# Altium PCB 5Vto12V_Boost_Converter(Motors).PcbDoc
Units mil, origin at the board's own origin, x right, y up, seen from the top; angles counter-clockwise.
Board outline 6000 x 2100 mil, 2 copper layers (Top Layer, Bottom Layer); 18 components, 13 nets, 46 pads, 8 vias.
Unrouted connection lines stored in the file: 7.
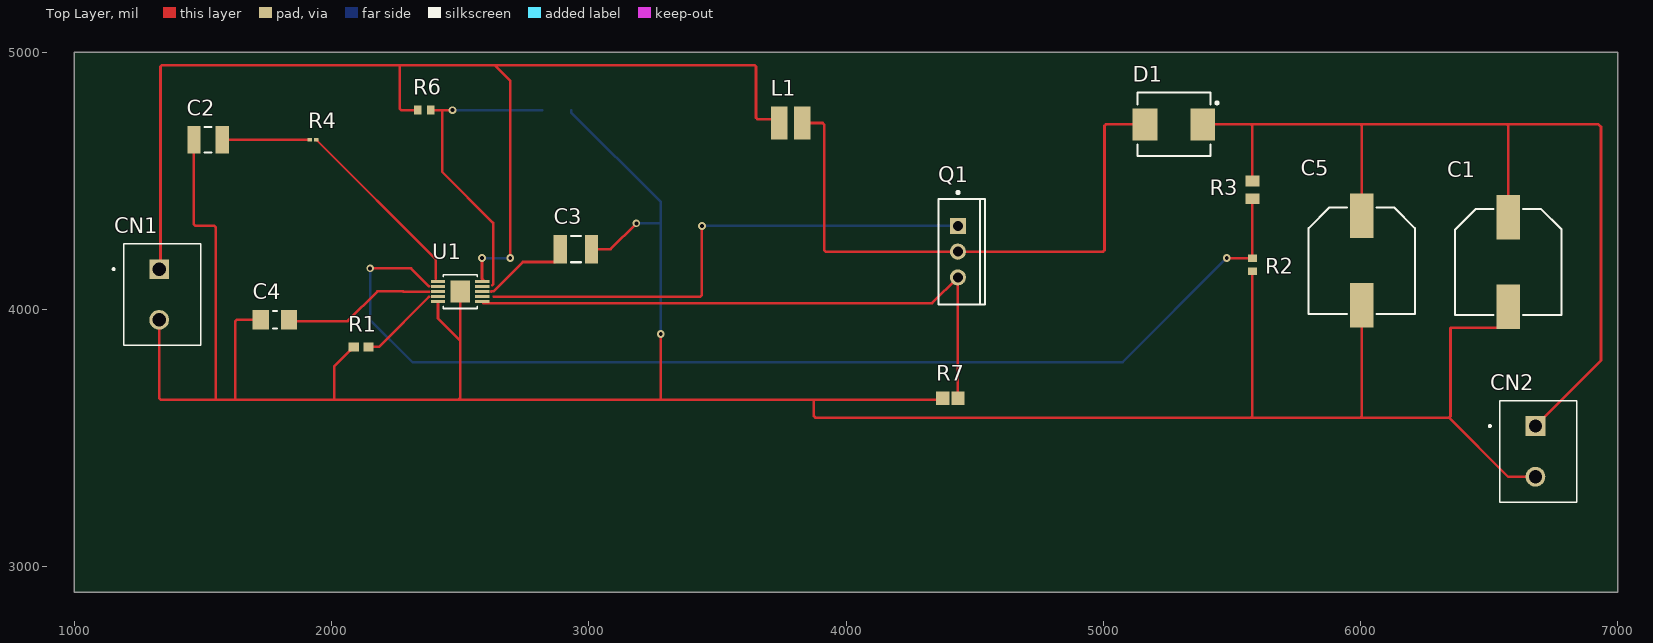
[diagram p0: Top Layer view]
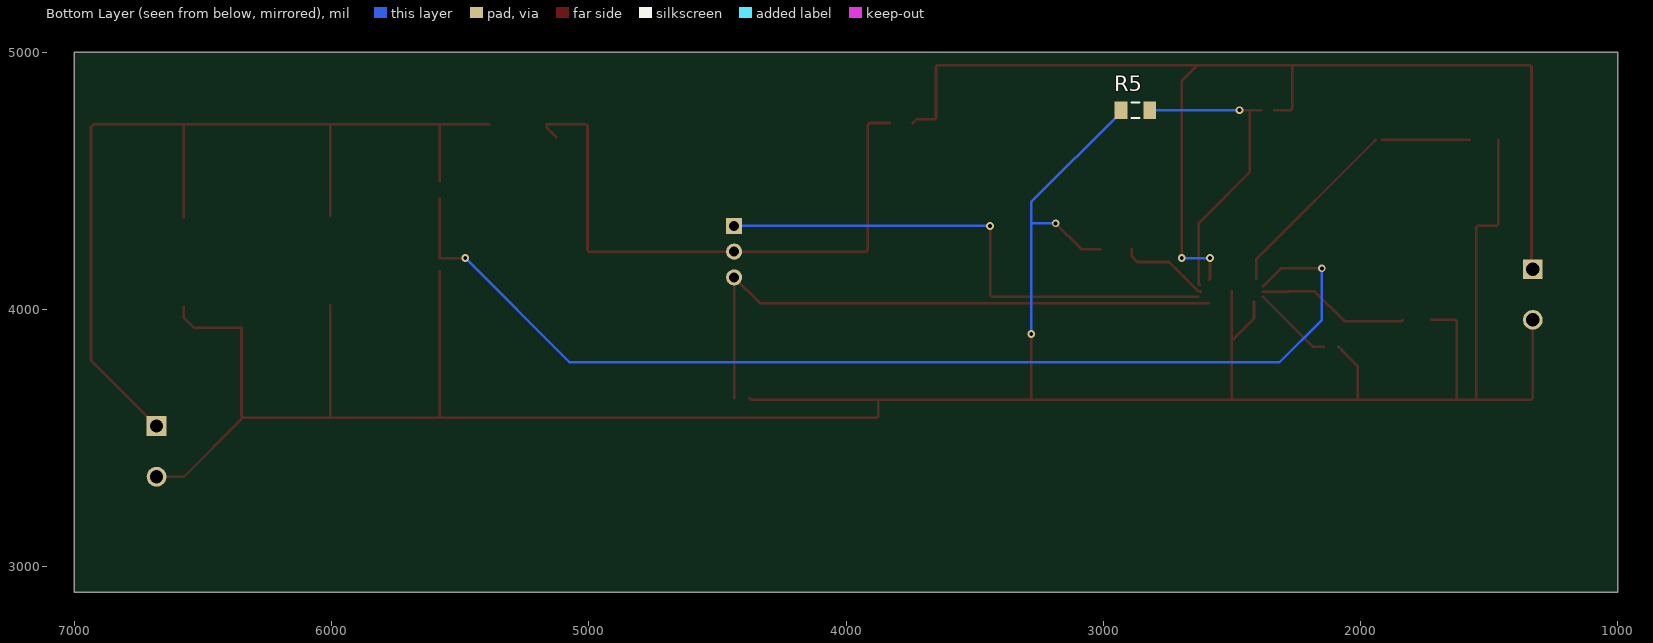
[diagram p1: Bottom Layer view, seen from below]

## Layer stack, top to bottom
Top Solder: solder mask 0.4, Solder Resist, Dk 3.5
Top Layer: signal copper 1.4
Dielectric 1: dielectric 12.6, FR-4, Dk 4.8
Bottom Layer: signal copper 1.4
Bottom Solder: solder mask 0.4, Solder Resist, Dk 3.5

## Board outline
1000,2900 7000,2900 7000,5000 1000,5000

## Design rules (kind name [scope] priority, off if disabled: settings)
Clearance [All] p1: gap=10 ignorepadtopadclearanceinfootprint=FALSE except(0: Arc-Hole Track-Hole SMDPad-Hole THPad-Hole Via-Hole Fill-Hole Poly-Hole Region-Hole Text-Hole)
PolygonConnect [All] p1: connectstyle=Relief reliefconductorwidth=10 reliefentries=4 polygonreliefangle="90 Angle" airgapwidth=10
RoutingVias [All] p1: holewidth=28 width=50 viastyle="Through Hole" minholewidth=28 minwidth=50 maxholewidth=28 maxwidth=50
SolderMaskExpansion [All] p1: expansion=4 istentingtop=FALSE
Width [All] p1: maxlimit=10 minlimit=10 preferedwidth=10
30 further rules are at their usual default settings.

## Components (designator, comment, footprint, x,y, rotation, side; value= is the part's Value field where it differs from the comment)
C1 "C6.8u" C6.8u 6575,4185 r270 top
C2 "C6800p" C6800p 1520,4660 r180 top
C3 "C4.7u" C4.7u 2950,4235 r0 top
C4 "C0.01u" C0.01u 1780,3960 r180 top
C5 "C6.8u" C6.8u 6005,4190 r270 top
CN1 "TB002-500-02BE" TB002-500-02BE 2975,4271.85 r270 top
CN2 "TB002-500-02BE" TB002-500-02BE 8325,3661.85 r270 top
D1 "MBRS340" MBRS340 5275,4720 r0 top
L1 "SRN3030HA-4R7Y(Inductor-1)" SRN3030HA-4R7Y(Inductor-1) 3784.68,4725 r0 top
Q1 "IPP126N10N3" IPP126N10N3 790,-14505 r0 top
R1 "R24.3k" R24.3k 2115,3855 r180 top
R2 "R11k" R11k 4850,54298.41 r270 top
R3 "R71.5k" R71.5k 5580,4465 r270 top
R4 "R22k" R22k 1927.8,4660 r180 top
R5 "10k" R10k 2875,4775 r0 bottom
R6 "R14.7k" R14.7k 2360,4775 r0 top
R7 "R25m" R25m 4405.47,3655 r180 top
U1 "LT3757" LT3757 -6795,2955 r0 top

## Footprints (in the part's own frame and the unit in brackets; to place one, negate y for a bottom-side part, rotate by r counter-clockwise, add the part's x,y. Pads: shape width x height; smd on the part's side, far side on the other; paste and mask are expansions set on the pad)
C0.01u [mm] "Chip Capacitor, 2-Leads, Body 3.30x1.60mm, IPC Medium Density"
  rect 1.6x1.95 smd: 1(-1.4,0) 2(1.4,0)
  silkscreen extent -0.2,-0.87 0.2,0.87, body extent -1.85,-0.97 1.85,0.97, height 1.35
C4.7u [mm] "Chip Capacitor, 2-Leads, Body 3.25x2.50mm, IPC Medium Density"
  rect 1.3x2.8 smd: 1(-1.55,0) 2(1.55,0)
  silkscreen extent -0.5,-1.3 0.5,1.3, body extent -1.85,-1.4 1.85,1.4, height 2.8
C6.8u [mm] "Aluminum Electrolytic Capacitor, Body 10.30x10.30x14.00mm, IPC Low Density"
  rect 4.4x2.3 smd: 1(-4.425,0) 2(4.425,0)
  silkscreen extent -5.25,-5.25 5.25,5.25, body extent -5.5,-5.25 5.5,5.25, height 14
C6800p [mm] "Chip Capacitor, 2-Leads, Body 3.20x2.50mm, IPC Medium Density"
  rect 1.3x2.7 smd: 1(-1.4,0) 2(1.4,0)
  silkscreen extent -0.35,-1.25 0.35,1.25, body extent -1.7,-1.35 1.7,1.35, height 2.2
IPP126N10N3 [mm]
  rect 1.6x1.6 hole 1: 1(92.583,478.282)
  round 1.6 hole 1: 2(92.583,475.742) 3(92.583,473.202)
  silkscreen extent 90.65,470.54 95.25,481.72, body extent 90.65,470.54 95.25,480.94, height 20.75
LT3757 [mil]
  rect 55x11 smd: 1(9209,1154.4) 2(9209,1134.7) 3(9209,1115) 4(9209,1095.3) 5(9209,1075.6) 6(9381,1075.6) 7(9381,1095.3) 8(9381,1115) 9(9381,1134.7) 10(9381,1154.4)
  rect 76x85 smd paste-78.74: 11(9295,1115)
  silkscreen extent 9229,1049 9361,1181, body extent 9236,1019 9354,1211, height 20
MBRS340 [mm] "Molded Diode, 2-Leads, Body 6.86x5.91mm, IPC Medium Density"
  rect 2.45x3.15 smd: 1(-2.85,0) 2(2.85,0)
  silkscreen extent -3.6,-3.15 4.38,3.15, body extent -3.77,-3.11 3.77,3.11, height 2.62
R10k [mm] "Chip Resistor, 2-Leads, Body 3.20x1.60mm, IPC Medium Density"
  rect 1.25x1.7 smd: 1(-1.425,0) 2(1.425,0)
  silkscreen extent -0.4,-0.75 0.4,0.75, body extent -1.7,-0.85 1.7,0.85, height 0.65
R11k [mm]
  rect 0.75x0.9 smd: 1(1272.5,18.542) 2(1273.8,18.542)
  body extent 1272.32,18.09 1273.97,18.99, height 0.58
R14.7k [mm] "Chip Resistor, 2-Leads, Body 1.55x0.80mm, IPC Medium Density"
  rect 0.75x0.9 smd: 1(-0.65,0) 2(0.65,0)
  body extent -0.82,-0.45 0.82,0.45, height 0.58
R22k [mm] "Chip Resistor, 2-Leads, Body 0.60x0.30mm, IPC Medium Density"
  rect 0.45x0.35 smd: 1(-0.325,0) 2(0.325,0)
  body extent -0.33,-0.18 0.33,0.18, height 0.26
R24.3k [mm] "Chip Resistor, 2-Leads, Body 1.60x0.80mm, IPC Medium Density"
  rect 1x0.9 smd: 1(-0.725,0) 2(0.725,0)
  body extent -0.87,-0.45 0.87,0.45, height 0.55
R25m [mm] "Chip Resistor, 2-Leads, Body 2.00x1.25mm, IPC Medium Density"
  rect 1.3x1.35 smd: 1(-0.75,0) 2(0.75,0)
  body extent -1.05,-0.67 1.05,0.67, height 0.8
R71.5k [mm] "Chip Resistor, 2-Leads, Body 2.00x1.25mm, IPC Medium Density"
  rect 1.05x1.4 smd: 1(-0.875,0) 2(0.875,0)
  body extent -1.05,-0.7 1.05,0.7, height 0.55
SRN3030HA-4R7Y(Inductor-1) [mm] "Chip Inductor, 2-Leads, Body 3.00x3.00mm, IPC Medium Density"
  rect 1.63x3.22 smd: 1(-1.135,0) 2(1.135,0)
  body extent -1.6,-1.6 1.6,1.6, height 3
TB002-500-02BE [mm]
  rect 1.95x1.95 / inner round 1.95 / far side rect 1.95x1.95 hole 1.3: 1(2.921,-41.783)
  round 1.95 hole 1.3: 2(7.921,-41.783)
  silkscreen extent 0.42,-46.38 10.42,-37.68

## Part data
C4: "SMD 0.01uF Capacitor"
R5: library part R10k, "SMD 10k Resistor"

## Via types
v1: diameter 30, hole 15, Top Layer to Bottom Layer, 8 vias

## Nets (pads, with @x,y where several pads share a name; then routed paths per layer and width w, separated by ;. In a path a pad name is that pad's centre, name@x,y a point inside that pad or via, vN(x,y) a via of type N, cw(c..) or ccw(c..) an arc to the next point about the centre after c; other vN are vias at no path point)
GND: C1.2 C2.2 C3.2 C4.2 C5.2 CN1.2 CN2.2 R1.2 R2.2 R5.2 R7.2 U1.5 U1.11 | length 11885.1
  Top Layer w10: CN1.2 1330,3655.86 1335.86,3650 1550,3650 ; C2.2 1464.88,4330.86 1470.74,4325 1544.14,4325 1550,4319.14 1550,3650 ; C4.2 1630.86,3960 1625,3954.14 1625,3650 ; R1.2 2084.49,3855 2071.77,3842.28 2071.77,3840.31 2010,3778.54 2010,3650 ; U1.5 2414,3966 2500,3880 ; U1.11 2500,3880 ; C3.2 3085,4235 v1(3185,4335) ; v1(3280,3905) 3280,3650 ; R7.2@4375.09,3655.86 4369.23,3650 3875,3650 ; R2.2 5580,3585.86 5574.14,3580 ; C5.2 6005,3585.86 5999.14,3580 ; C1.2 6575,3969.45 6534.72,3929.17 6351.68,3929.17 6350,3927.49 6350,3585.86 6344.14,3580 ; CN2.2 6574.14,3350 6344.14,3580 ; 1550,3650 1625,3650 ; 1625,3650 2010,3650 ; 2010,3650 2494.14,3650 ; 2494.14,3650 3280,3650 ; 2494.14,3650 2500,3655.86 2500,3880 ; 3280,3650 3875,3650 ; 3875,3650 3875,3585.86 3880.86,3580 5574.14,3580 ; 5574.14,3580 5999.14,3580 ; 5999.14,3580 6344.14,3580
  Bottom Layer w10: R5.2 2931.1,4766.14 3280,4417.24 3280,4335 ; v1(3185,4335) 3280,4335 ; v1(3280,3905) 3280,4335
NetC1_1: C1.1 C5.1 CN2.1 D1.2 R3.1 | length 3765.1
  Top Layer w10: D1.2 5574.14,4720 ; R3.1 5580,4714.14 5574.14,4720 ; C5.1 6005,4714.14 5999.14,4720 ; C1.1 6575,4714.14 6569.14,4720 ; CN2.1 6935,3801.85 6935,4710 6925,4720 6569.14,4720 ; 5574.14,4720 5999.14,4720 ; 5999.14,4720 6569.14,4720
NetC2_1: C2.1 R4.2 | length 339.9
  Top Layer w10: C2.1 R4.2
NetC3_1: C3.1 U1.8 | length 354.1
  Top Layer w10: 2620.51,4070 2621.72,4070 2622.02,4070.3 2629.4,4070.3 2743.98,4184.88 2868.39,4184.88 2888.98,4205.47 C3.1
NetC4_1: C4.1 U1.3 | length 594.4
  Top Layer w10: C4.1 1840.12,3955 2062.9,3955 2178.2,4070.3 2278.54,4070.3 2279.14,4069.7 2379.49,4069.7
NetCN1_1: CN1.1 L1.1 R6.1 U1.10 | length 4619.4
  Top Layer w10: CN1.1 1335,4161.85 1335,4944.14 1340.86,4950 2265,4950 ; R6.1 2270.86,4775 2265,4780.86 2265,4950 ; v1(2585,4200) 2585,4120 2590,4115 ; v1(2695,4200) 2695,4889.14 2634.14,4950 ; L1.1 3725,4740 3655.86,4740 3650,4745.86 3650,4944.14 3644.14,4950 2634.14,4950 ; 2265,4950 2634.14,4950
  Bottom Layer w10: v1(2585,4200) v1(2695,4200)
NetD1_1: D1.1 L1.2 Q1.2 | length 2379.7
  Top Layer w10: L1.2 3909.14,4725 3915,4719.14 3915,4230.86 3920.86,4225 Q1.2 4999.14,4225 5005,4230.86 5005,4714.14 5010.86,4720 D1.1 5162.8,4706.22 D1.1@5126.57,4670
NetQ1_1: Q1.1 U1.7 | length 2076.4
  Top Layer w10: 2630,4050 2630.3,4050.3 3434.14,4050.3 3440,4056.16 v1(3440,4325)
  Bottom Layer w10: v1(3440,4325) Q1.1
NetQ1_3: Q1.3 R7.1 U1.6 | length 2356.4
  Top Layer w10: 2590,4025 4335,4025 Q1.3 R7.1
NetR1_1: R1.1 U1.4 | length 316.6
  Top Layer w10: R1.1 2184.19,3855 2378.89,4049.7 2379.49,4049.7
NetR2_1: R2.1 R3.2 U1.2 | length 4355.3
  Top Layer w10: v1(2150,4160) 2309.19,4160 2379.49,4089.7 ; v1(5480,4200) R2.1 R3.2
  Bottom Layer w10: v1(2150,4160) 2150,3960 2315,3795 5075,3795 v1(5480,4200)
NetR4_1: R4.1 U1.1 | length 733.5
  Top Layer w10: R4.1 1942.56,4660 1944.45,4658.11 1944.45,4656.14 2405,4195.59 2405,4120
NetR5_1: R5.1 R6.2 U1.9 | length 1182.2
  Top Layer w10: R6.2 2430,4775 ; v1@2455,4775 2430,4775 ; 2625.35,4094.7 2625.51,4094.7 2628.5,4097.69 2628.5,4337.09 2430,4535.59 2430,4775
  Bottom Layer w10: v1(2470,4775) R5.1